# EAGLE board alarmr (EAGLE 6.6.0)
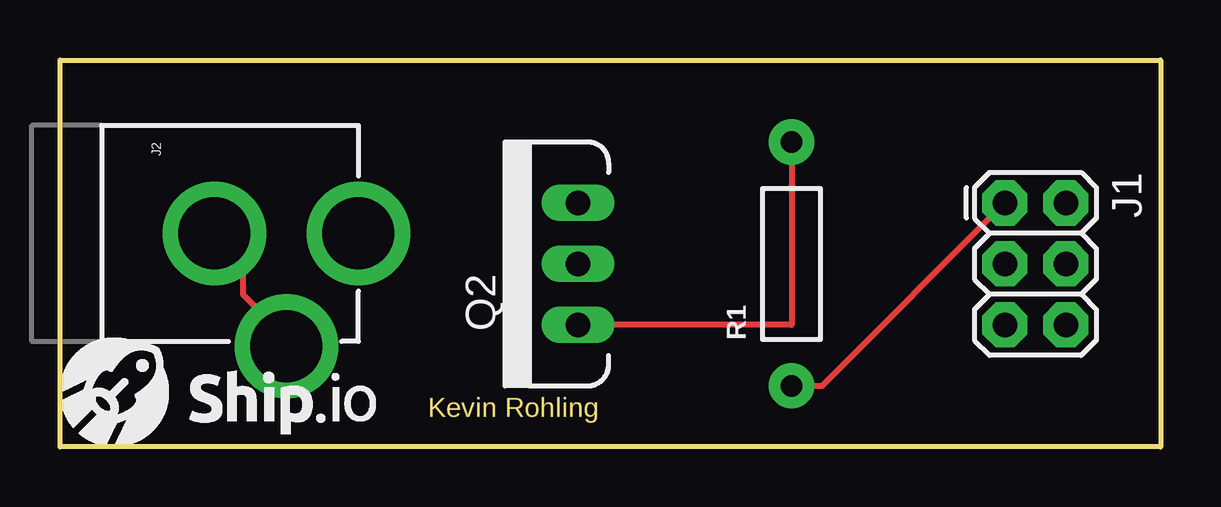
[diagram p0: board, top side]
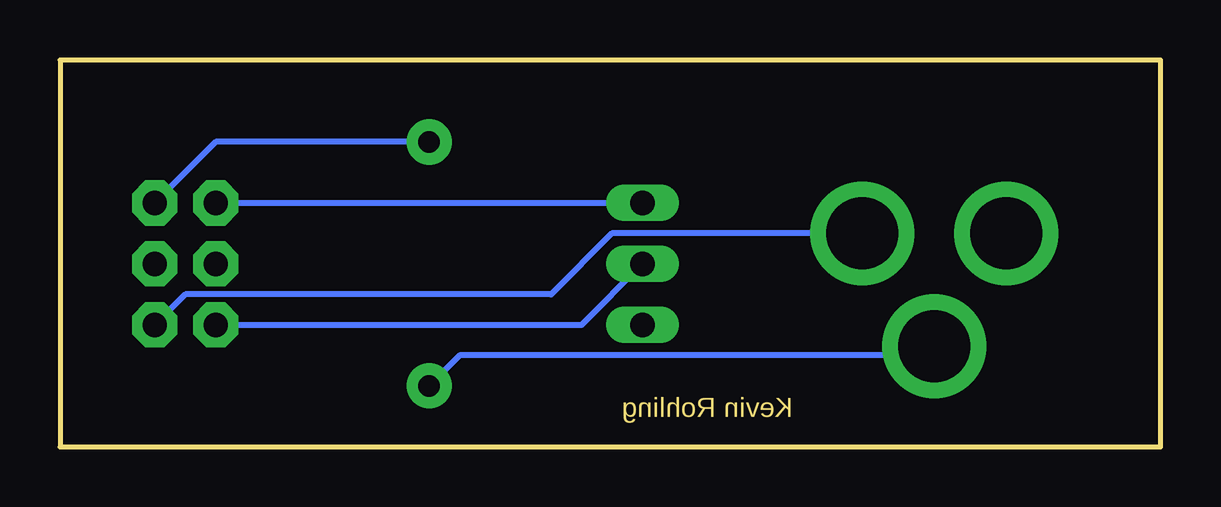
[diagram p1: board, bottom side, seen from below]

Size 45.86 x 16.12 mm. Coordinates in mm from the lower left corner, seen from the top.
Outline: 0,0 0,16.12 45.86,16.12 45.86,0 0,0
Copper layers (1*16): Top 0.035mm / dielectric 1.5mm / Bottom 0.035mm
Design rules "default": minimum track width 10mil, minimum drill 24mil, track to track 8mil, track to pad 8mil, pad to pad 8mil, via to via 8mil, smd to smd 8mil, copper to edge 40mil, drill to drill 8mil, minimum pad ring 10mil, minimum via ring 8mil, stop-mask expansion 4mil, vias tented up to drill 0mil, thermal gap 10mil

## Footprints (pad centres in the part's own frame; a part is rotated, then mirrored left to right if it is on the bottom)
2X3 = drill 1.016 pad 1.88 octagon: 1 0,0; 2 0,2.54; 3 2.54,0; 4 2.54,2.54; 5 5.08,0; 6 5.08,2.54
POWER_JACK_PTH = drill 2.997 pad 4.318: GND 0,7.7; GNDBREAK 4.7,10.7; PWR 0,13.7
TO220V = drill 1.016 long: 1 -2.54,0; 2 0,0; 3 2.54,0
AXIAL-0.4 = drill 0.9 pad 1.88: P$1 -5.08,0; P$2 5.08,0

## Placement (x,y rotation side)
J1  AVR_SPI_PRG_6PTH  [2X3]  39.37,10.16 270 top
J2  POWER_JACKPTH  [POWER_JACK_PTH]  -1.27,8.89 270 top
Q2  MOSFET-NCHANNELFQP30N06L  [TO220V]  21.59,7.62 90 top
R1  [AXIAL-0.4]  30.48,7.62 90 top

## Library data of the parts
J1 = SparkFun-Connectors
J2 = SparkFun-Connectors; PROD_ID: PRT-00119
Q2 = SparkFun-DiscreteSemi; PROD_ID: TRANS-10060
R1 = SparkFun-Resistors

## Nets
GND: J1.1 J2.GND J2.GNDBREAK Q2.3 R1.P$1
N$1: J1.5 Q2.2
N$2: J1.2 Q2.1 R1.P$2
N$3: J1.6 J2.PWR

## Tracks (layer width: path | path; a pad name or v marks a point on that pad's centre or on a via)
GND
  Top 0.254: J2.GNDBREAK 8.89,5.08 7.62,6.35 7.62,8.89 J2.GND | J1.1 31.75,2.54 R1.P$1
  Bottom 0.254: J1.1 Q2.3 | R1.P$1 29.21,3.81 10.16,3.81 J2.GNDBREAK
N$1
  Bottom 0.254: Q2.2 24.13,5.08 J1.5
N$2
  Top 0.254: Q2.1 30.48,5.08 R1.P$2
  Bottom 0.254: J1.2 39.37,12.7 R1.P$2
N$3
  Bottom 0.254: J1.6 40.64,6.35 25.4,6.35 22.86,8.89 J2.PWR

## Text on the board
Dimension: Kevin Rohling